# Altium PCB PCB2.pcbdoc
Units mil, origin at the board's own origin, x right, y up, seen from the top; angles counter-clockwise.
Board outline 2930.23 x 1550 mil, 2 copper layers (Top Layer, Bottom Layer); 21 components, 22 nets, 59 pads, 21 vias.
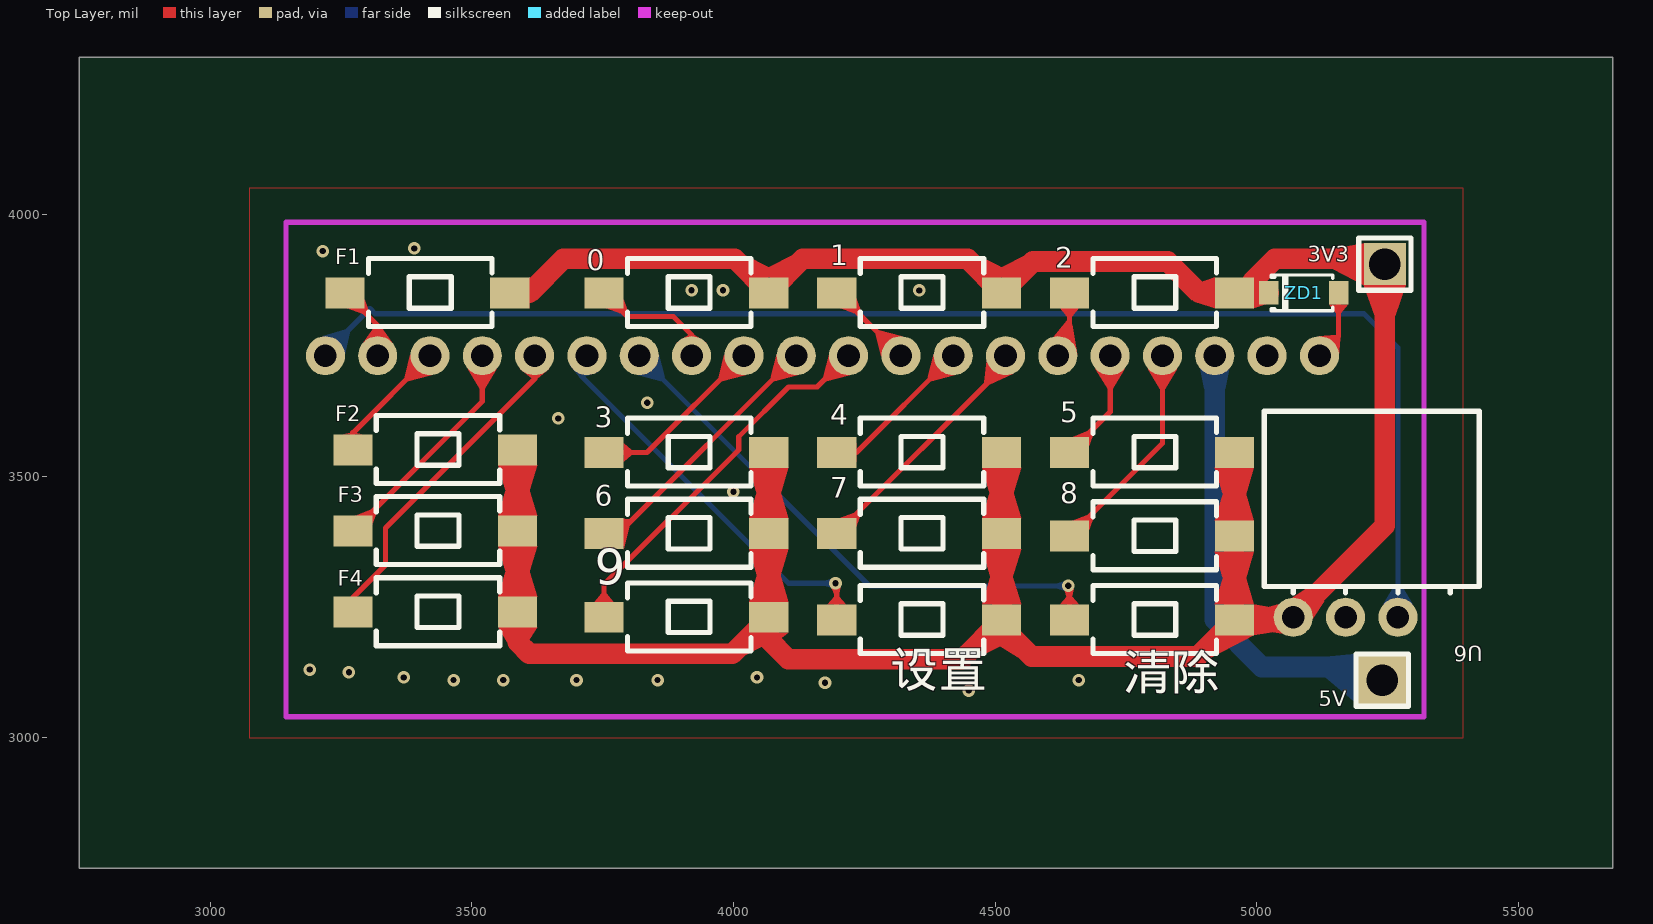
[diagram p0: Top Layer view]
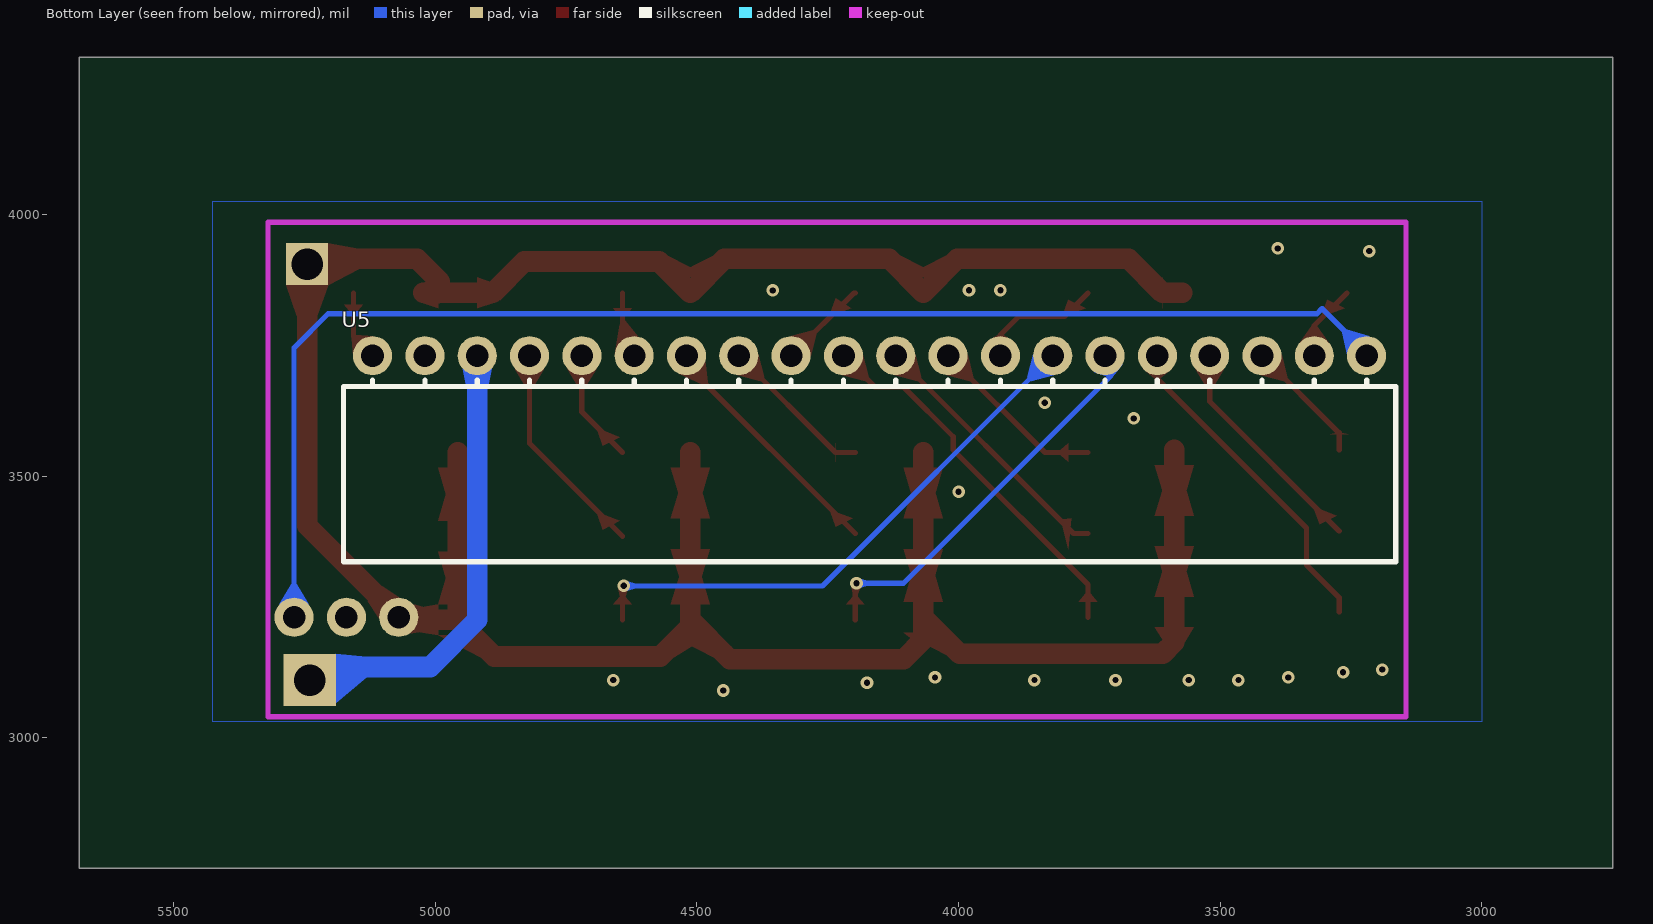
[diagram p1: Bottom Layer view, seen from below]

## Layer stack, top to bottom
Top Layer: signal copper (thickness not stored)
Dielectric: dielectric 12.6, FR-4, Dk 4.8
Bottom Layer: signal copper (thickness not stored)

## Board outline
5680.23,2750 2750,2750 2750,4300 5680.23,4300

## Components (designator, comment, footprint, x,y, rotation, side; value= is the part's Value field where it differs from the comment)
0 "TS-1101-C-W" SW-SMD_L6.0-W3.3-LS8.0 3910,3850 r180 top
1 "TS-1101-C-W" SW-SMD_L6.0-W3.3-LS8.0 4355,3850 r180 top
2 "TS-1101-C-W" SW-SMD_L6.0-W3.3-LS8.0 4800,3850 r180 top
3 "TS-1101-C-W" SW-SMD_L6.0-W3.3-LS8.0 3910,3545 r180 top
3V3 "2.54-1*1P针" HDR-TH_1P-P2.54-V-M#1 5245,3905 r180 top
4 "TS-1101-C-W" SW-SMD_L6.0-W3.3-LS8.0 4355,3545 r180 top
5 "TS-1101-C-W" SW-SMD_L6.0-W3.3-LS8.0 4800,3545 r180 top
5V "2.54-1*1P针" HDR-TH_1P-P2.54-V-M#2 5240,3110 r180 top
6 "TS-1101-C-W" SW-SMD_L6.0-W3.3-LS8.0 3910,3390 r180 top
7 "TS-1101-C-W" SW-SMD_L6.0-W3.3-LS8.0 4355,3390 r180 top
8 "TS-1101-C-W" SW-SMD_L6.0-W3.3-LS8.0 4800,3385 r180 top
9 "TS-1101-C-W" SW-SMD_L6.0-W3.3-LS8.0 3910,3230 r180 top
F1 "TS-1101-C-W" SW-SMD_L6.0-W3.3-LS8.0 3415,3850 r180 top
F2 "TS-1101-C-W" SW-SMD_L6.0-W3.3-LS8.0 3430,3550 r180 top
F3 "TS-1101-C-W" SW-SMD_L6.0-W3.3-LS8.0 3430,3395 r180 top
F4 "TS-1101-C-W" SW-SMD_L6.0-W3.3-LS8.0 3430,3240 r180 top
U5 "PM254-1-20-W-8.5" HDR-TH_20P-P2.54-H-F-W10.0-N 4170,3730 r180 bottom
U6 "PM254-1-04-W-8.5" HDR-TH_4P-P2.54-H-F-W10.0-N 5220,3230 r180 top
ZD1 "BZT52C16_C2105" SOD-123_L2.8-W1.8-LS3.7-RD 5090,3850 r0 top
清除 "TS-1101-C-W" SW-SMD_L6.0-W3.3-LS8.0 4800,3225 r180 top
设置 "TS-1101-C-W" SW-SMD_L6.0-W3.3-LS8.0 4355,3225 r180 top

## Footprints (in the part's own frame and the unit in brackets; to place one, negate y for a bottom-side part, rotate by r counter-clockwise, add the part's x,y. Pads: shape width x height; smd on the part's side, far side on the other; paste and mask are expansions set on the pad)
HDR-TH_1P-P2.54-V-M#1 [mil]
  rect 80x80 hole 60: 1(0,0)
  silkscreen extent -50,-50 50,50
HDR-TH_1P-P2.54-V-M#2 [mil]
  rect 100x100 hole 60: 1(0,0)
  silkscreen extent -50,-50 50,50
HDR-TH_4P-P2.54-H-F-W10.0-N [mm]
  round 1.9 hole 1.1: 2(-1.27,0) 3(1.27,0) 4(3.81,0)
  silkscreen extent -5.22,-10 5.22,-1.18
HDR-TH_20P-P2.54-H-F-W10.0-N [mm]
  round 1.9 hole 1.1: 1(-24.13,0) 2(-21.59,0) 3(-19.05,0) 4(-16.51,0) 5(-13.97,0) 6(-11.43,0) 7(-8.89,0) 8(-6.35,0) 9(-3.81,0) 10(-1.27,0) 11(1.27,0) 12(3.81,0) 13(6.35,0) 14(8.89,0) 15(11.43,0) 16(13.97,0) 17(16.51,0) 18(19.05,0) 19(21.59,0) 20(24.13,0)
  silkscreen extent -25.54,-10 25.54,-1.18
SOD-123_L2.8-W1.8-LS3.7-RD [mm]
  rect 0.95x1.15 smd: 1(-1.692,0) 2(1.692,0)
  silkscreen extent -1.58,-0.87 1.41,0.87
SW-SMD_L6.0-W3.3-LS8.0 [mm]
  rect 1.9x1.5 smd: 1(-4,0) 2(4,0)
  silkscreen extent -3.14,-1.67 2.86,1.63

## Via types
v1: diameter 24.02, hole 12.01, Top Layer to Bottom Layer, 21 vias

## Nets (pads, with @x,y where several pads share a name; then routed paths per layer and width w, separated by ;. In a path a pad name is that pad's centre, name@x,y a point inside that pad or via, vN(x,y) a via of type N, cw(c..) or ccw(c..) an arc to the next point about the centre after c; other vN are vias at no path point)
3: U5.1 ZD1.2 | length 135.2
  Top Layer w10: U5.1 5156.63,3766.63 ZD1.2
3V3: 0.1 1.1 2.1 3.1 3V3.1 4.1 5.1 6.1 7.1 8.1 9.1 F1.1 F2.1 F3.1 F4.1 U6.4 ZD1.1 清除.1 设置.1 | length 5652.8
  Top Layer w39.37: F1.1 3610,3850 3675,3915 4002.48,3915 0.1 4132.48,3915 4447.48,3915 1.1 4572.48,3910 4830,3910 4890,3850 2.1 2.1@4991.21,3850 ; F2.1 F3.1 F4.1 3587.48,3182.52 3610,3160 3997.48,3160 9.1 ; 3.1 6.1 9.1 ; 4.1 7.1 设置.1 ; 5.1 8.1 清除.1 ; ZD1.1 2.1@4991.21,3850 ; 9.1 4067.48,3187.52 4105,3150 4437.48,3150 设置.1 ; 设置.1 4512.48,3212.52 4570,3155 4887.48,3155 清除.1 ; 清除.1 5065,3225 U6.4 5245,3405 3V3.1 5235,3915 5035,3915 4991.21,3871.21 2.1@4991.21,3850
5V: 5V.1 U5.3 | length 872.6
  Bottom Layer w39.37: U5.3 4920,3225 5010,3135 5215,3135 5V.1
$1N3278: 8.2 U5.4 | length 418.5
  Top Layer w10: 8.2 4820,3562.48 U5.4
$1N3283: 5.2 U5.5 | length 217.1
  Top Layer w10: 5.2 4720,3622.48 U5.5
$1N3288: 2.2 U5.6 | length 129.3
  Top Layer w10: U5.6 4642.52,3752.52 2.2
$1N3295: 7.2 U5.7 | length 473.6
  Top Layer w10: 7.2 4520,3712.48 U5.7
$1N3299: 4.2 U5.8 | length 299.1
  Top Layer w10: 4.2 4235,3545 U5.8
$1N3303: 1.2 U5.9 | length 172.2
  Top Layer w10: 1.2 4200,3850 U5.9
$1N3306: 9.2 U5.10 | length 725.9
  Top Layer w10: 9.2 3752.52,3292.52 4010,3550 4010,3575 4105,3670 4160,3670 U5.10
$1N3309: 6.2 U5.11 | length 508.3
  Top Layer w10: 6.2 3780,3390 U5.11
$1N3312: 3.2 U5.12 | length 344.1
  Top Layer w10: 3.2 3835,3545 U5.12
$1N3315: 0.2 U5.13 | length 240.6
  Top Layer w10: 0.2 3797.52,3805 3885,3805 3920,3770 U5.13
$1N3318: U5.14 清除.2 | length 1068.3
  Top Layer w10: v1(4640,3290) 4642.52,3287.48 清除.2
  Bottom Layer w10: U5.14 4260,3290 v1(4640,3290)
$1N3321: U5.15 设置.2 | length 763.8
  Top Layer w10: v1(4195,3295) 4197.52,3292.48 设置.2
  Bottom Layer w10: U5.15 3710,3720 3710,3690 4105,3295 v1(4195,3295)
$1N3324: F4.2 U5.16 | length 633.9
  Top Layer w10: F4.2 3272.52,3267.52 3335,3330 3335,3400.63 3620,3685.63 U5.16
$1N3327: F3.2 U5.17 | length 437.5
  Top Layer w10: F3.2 3520,3642.48 U5.17
$1N3330: F2.2 U5.18 | length 241.1
  Top Layer w10: F2.2 3272.52,3582.52 U5.18
$1N3333: F1.2 U5.19 | length 145.9
  Top Layer w10: F1.2 3320,3787.52 U5.19
$1N7182: U5.20 U6.2 | length 2636.3
  Bottom Layer w10: U5.20 3220,3735 3305,3820 3315,3810 5205,3810 5270,3745 U6.2
GND: U5.2 U6.3
  other v1: 4450,3090 4175,3105 3465,3110 3560,3110 3700,3110 3855,3110 4660,3110 3370,3115 4045,3115 3265,3125 3190,3130 4000,3470 3665,3610 3835,3640 3920,3855 3980,3855 4355,3854.74 3215,3930 3390,3935
"": 

## Polygon pours and split planes (outlines as drawn)
GND on Top Layer (solid, remove dead copper, pour order 0): 3075,3000 5395,3000 5395,4050 3075,4050
GND on Bottom Layer (solid, remove dead copper, pour order 1): 3000,3030 5425,3030 5425,4025 3000,4025

## Keep-outs
Board Outline Layer:
  lines w10 net "": 3145,3040 5320,3040 5320,3985 3145,3985 3145,3040

## Other copper
Top Layer:
  region net 3V3: 4977.17,3473.58 4937.8,3473.58 4920.08,3414.53 4994.88,3414.53
  region net 3V3: 4977.17,3296.42 4994.88,3355.47 4920.08,3355.47 4937.8,3296.42
  region net $1N3278: 4689.73,3425.13 4675.58,3425.13 4647.3,3414.53 4679.92,3397.65
  region net 3V3: 4977.17,3456.42 4994.88,3515.47 4920.08,3515.47 4937.8,3456.42
  region net $1N3283: 4675.58,3585.13 4647.3,3574.53 4679.92,3557.65 4689.73,3585.13
  region net 3V3: 4890,3869.68 4890,3830.31 4920.08,3820.47 4920.08,3879.53
  region net 3V3: 5023.37,3869.68 4994.88,3879.53 4994.88,3820.47 5023.37,3830.31
  region net $1N3288: 4637.52,3805.47 4647.52,3805.47 4660.02,3820.47 4625.02,3820.47
  region net 3V3: 4492.8,3301.42 4532.17,3301.42 4549.88,3360.47 4475.08,3360.47
  region net 3V3: 4492.8,3478.58 4475.08,3419.53 4549.88,3419.53 4532.16,3478.58
  region net $1N3295: 4244.73,3430.13 4230.58,3430.13 4202.3,3419.53 4234.92,3402.65
  region net 3V3: 4492.8,3456.42 4532.16,3456.42 4549.88,3515.47 4475.08,3515.47
  region net $1N3299: 4235,3540 4235,3550 4234.92,3562.5 4234.92,3527.5
  region net 3V3: 4555.93,3921.29 4475.08,3879.53 4549.88,3879.53 4586.4,3896.08
  region net 3V3: 4469.03,3921.29 4433.56,3901.08 4475.08,3879.53 4549.88,3879.53
  region net $1N3303: 4245.53,3811.54 4234.92,3839.83 4204.78,3820.47 4233.06,3809.87
  region net 3V3: 4047.8,3318.58 4030.08,3259.53 4104.88,3259.53 4087.17,3318.58
  region net 3V3: 4024.03,3158.71 4104.88,3200.47 4030.08,3200.47 3988.32,3178.68
  region net 3V3: 4047.8,3187.52 4087.17,3187.52 4104.88,3200.47 4030.08,3200.47
  region net $1N3306: 3747.52,3274.53 3735.02,3259.53 3770.02,3259.53 3757.52,3274.53
  region net 3V3: 4047.8,3301.42 4087.17,3301.42 4104.88,3360.47 4030.08,3360.47
  region net 3V3: 4047.8,3478.58 4030.08,3419.53 4104.88,3419.53 4087.17,3478.58
  region net $1N3309: 3800.53,3417.6 3784.78,3419.53 3789.92,3360.47 3800.53,3403.46
  region net 3V3: 4047.8,3456.42 4087.17,3456.42 4104.88,3515.47 4030.08,3515.47
  region net $1N3312: 3804.92,3540 3804.92,3550 3789.92,3562.5 3789.92,3527.5
  region net 3V3: 4024.03,3921.29 3988.56,3901.08 4030.08,3879.53 4104.88,3879.53
  region net 3V3: 4110.93,3921.29 4030.08,3879.53 4104.88,3879.53 4146.4,3901.08
  region net $1N3315: 3799.73,3809.87 3789.92,3837.35 3757.3,3820.47 3785.58,3809.87
  region net 3V3: 4914.03,3153.71 4994.88,3195.47 4920.08,3195.47 4878.32,3173.68
  region net 3V3: 4977.17,3313.58 4937.8,3313.58 4920.08,3254.53 4994.88,3254.53
  region net 3V3: 5053.94,3244.68 4994.88,3254.53 4994.88,3195.47 5053.94,3205.31
  region net $1N3318: 4637.52,3269.53 4625.02,3254.53 4660.02,3254.53 4647.52,3269.53
  region net 3V3: 4492.8,3313.58 4475.08,3254.53 4549.88,3254.53 4532.17,3313.58
  region net 3V3: 4543.45,3153.71 4583.92,3168.92 4549.88,3195.47 4475.08,3195.47
  region net 3V3: 4469.03,3153.71 4549.88,3195.47 4475.08,3195.47 4433.32,3173.68
  region net $1N3321: 4192.52,3269.53 4180.02,3254.53 4215.02,3254.53 4202.52,3269.53
  region net 3V3: 3567.8,3328.58 3550.08,3269.53 3624.88,3269.53 3607.17,3328.58
  region net 3V3: 3567.8,3182.52 3607.17,3182.52 3624.88,3210.47 3550.08,3210.47
  region net 3V3: 3567.8,3306.42 3607.17,3306.42 3624.88,3365.47 3550.08,3365.47
  region net 3V3: 3567.8,3483.58 3550.08,3424.53 3624.88,3424.53 3607.17,3483.58
  region net $1N3327: 3319.73,3435.13 3305.58,3435.13 3277.3,3424.53 3309.92,3407.65
  region net 3V3: 3567.8,3461.42 3607.17,3461.42 3624.88,3520.47 3550.08,3520.47
  region net $1N3330: 3277.52,3582.52 3267.52,3582.52 3255.02,3579.53 3290.02,3579.53
  region net 3V3: 3610,3869.68 3609.88,3879.53 3609.88,3820.47 3610,3830.31
  region net $1N3333: 3304.73,3809.87 3294.92,3837.35 3262.3,3820.47 3290.58,3809.87
  region net 3: 5157.33,3727.66 5160.17,3763.09 5153.09,3770.17 5117.66,3767.33
  region net $1N3278: 4791.95,3705.26 4815,3666.42 4825,3666.42 4848.05,3705.26
  region net $1N3283: 4691.95,3705.26 4715,3666.42 4725,3666.42 4748.05,3705.26
  region net $1N3288: 4657.29,3732.86 4647.52,3788.88 4637.52,3796.42 4612.5,3766.64
  region net $1N3295: 4484,3719.85 4479.41,3678.96 4488.96,3674.37 4534.57,3695.55
  region net $1N3299: 4382.67,3732.34 4371.5,3688.58 4378.58,3681.5 4422.34,3692.67
  region net $1N3303: 4322.34,3767.33 4278.58,3778.5 4271.5,3771.42 4282.67,3727.66
  region net $1N3306: 4182.67,3732.34 4171.5,3688.58 4178.58,3681.5 4222.34,3692.67
  region net $1N3309: 4082.67,3732.34 4071.5,3688.58 4078.58,3681.5 4122.34,3692.67
  region net $1N3312: 3982.67,3732.34 3971.5,3688.58 3978.58,3681.5 4022.34,3692.67
  region net $1N3315: 3948.05,3754.74 3925,3770 3915,3770 3891.95,3754.74
  region net $1N3324: 3591.95,3705.26 3615,3685.63 3625,3685.63 3648.05,3705.26
  region net $1N3327: 3491.95,3705.26 3515,3666.42 3525,3666.42 3548.05,3705.26
  region net $1N3330: 3382.67,3732.34 3371.5,3688.58 3378.58,3681.5 3422.34,3692.67
  region net $1N3333: 3348.05,3754.74 3325,3787.52 3315,3787.52 3291.95,3754.74
  region net 3: 5151.63,3812.36 5161.63,3812.36 5174.13,3827.36 5139.13,3827.36
  region net 3V3: 4991.21,3869.68 4991.21,3830.31 5004.67,3827.36 5004.67,3872.64
  region net 3V3: 5041.73,3254.49 5003.86,3244.68 5009.17,3205.31 5049.23,3198.89
  region net 3V3: 5107.33,3227.66 5128.88,3261.04 5101.04,3288.88 5067.66,3267.33
  region net 3V3: 5145.94,3895.32 5205,3865 5205,3945 5145.94,3934.69
  region net 3V3: 5264.69,3805.94 5285,3865 5205,3865 5225.31,3805.94
  region net $1N3321: 4187.86,3285.34 4192.52,3273.59 4202.52,3275.74 4205.47,3289.12
  region net $1N3318: 4632.86,3280.34 4637.52,3268.59 4647.52,3270.74 4650.47,3284.12
Bottom Layer:
  region net 5V: 4891.95,3705.26 4900.31,3666.42 4939.69,3666.42 4948.05,3705.26
  region net $1N3318: 3817.66,3692.67 3861.42,3681.5 3868.5,3688.58 3857.33,3732.34
  region net $1N3321: 3686.36,3713.66 3705,3690 3715,3690 3740.42,3698.66
  region net $1N7182: 3257.38,3731.2 3266.3,3774.22 3258.55,3780.62 3214.14,3766.94
  region net 5V: 5130.94,3115.32 5190,3066.1 5190,3160 5130.94,3154.68
  region net $1N7182: 5298.05,3254.74 5275,3293.58 5265,3293.58 5241.95,3254.74
  region net $1N3321: 4187.06,3304.01 4174.59,3300 4174.59,3290 4187.06,3285.99
  region net $1N3318: 4632.06,3299.01 4619.59,3295 4619.59,3285 4632.06,3280.99